# EAGLE board tinyduino-driver (EAGLE 6.4)
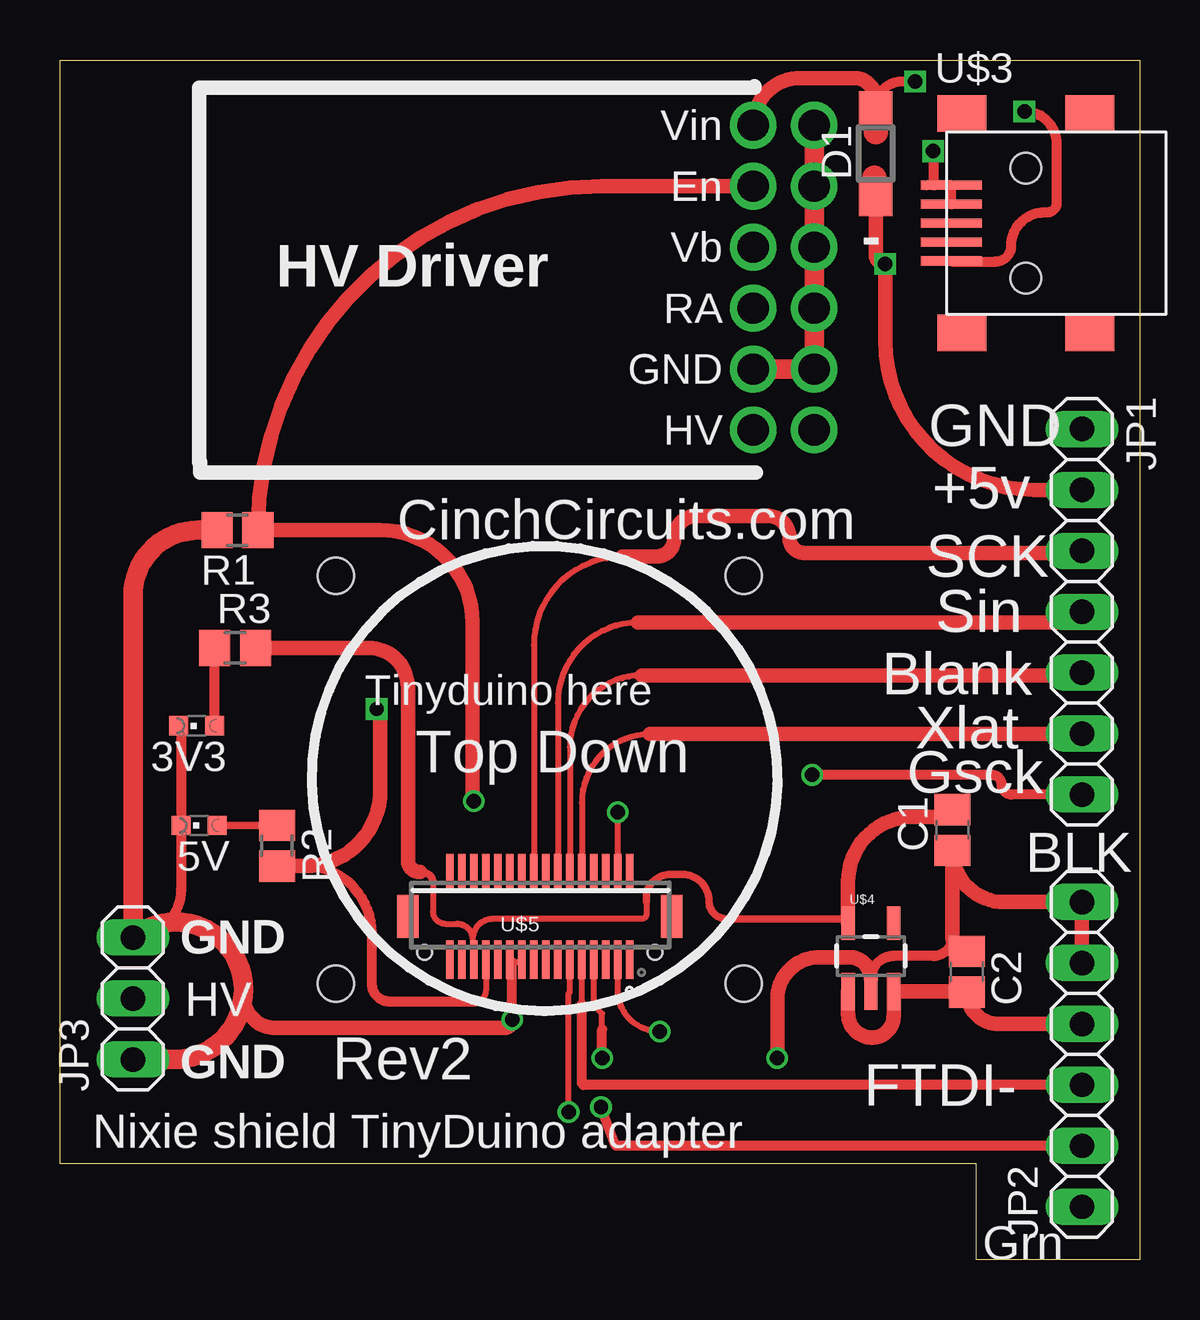
[diagram p0: board, top side]
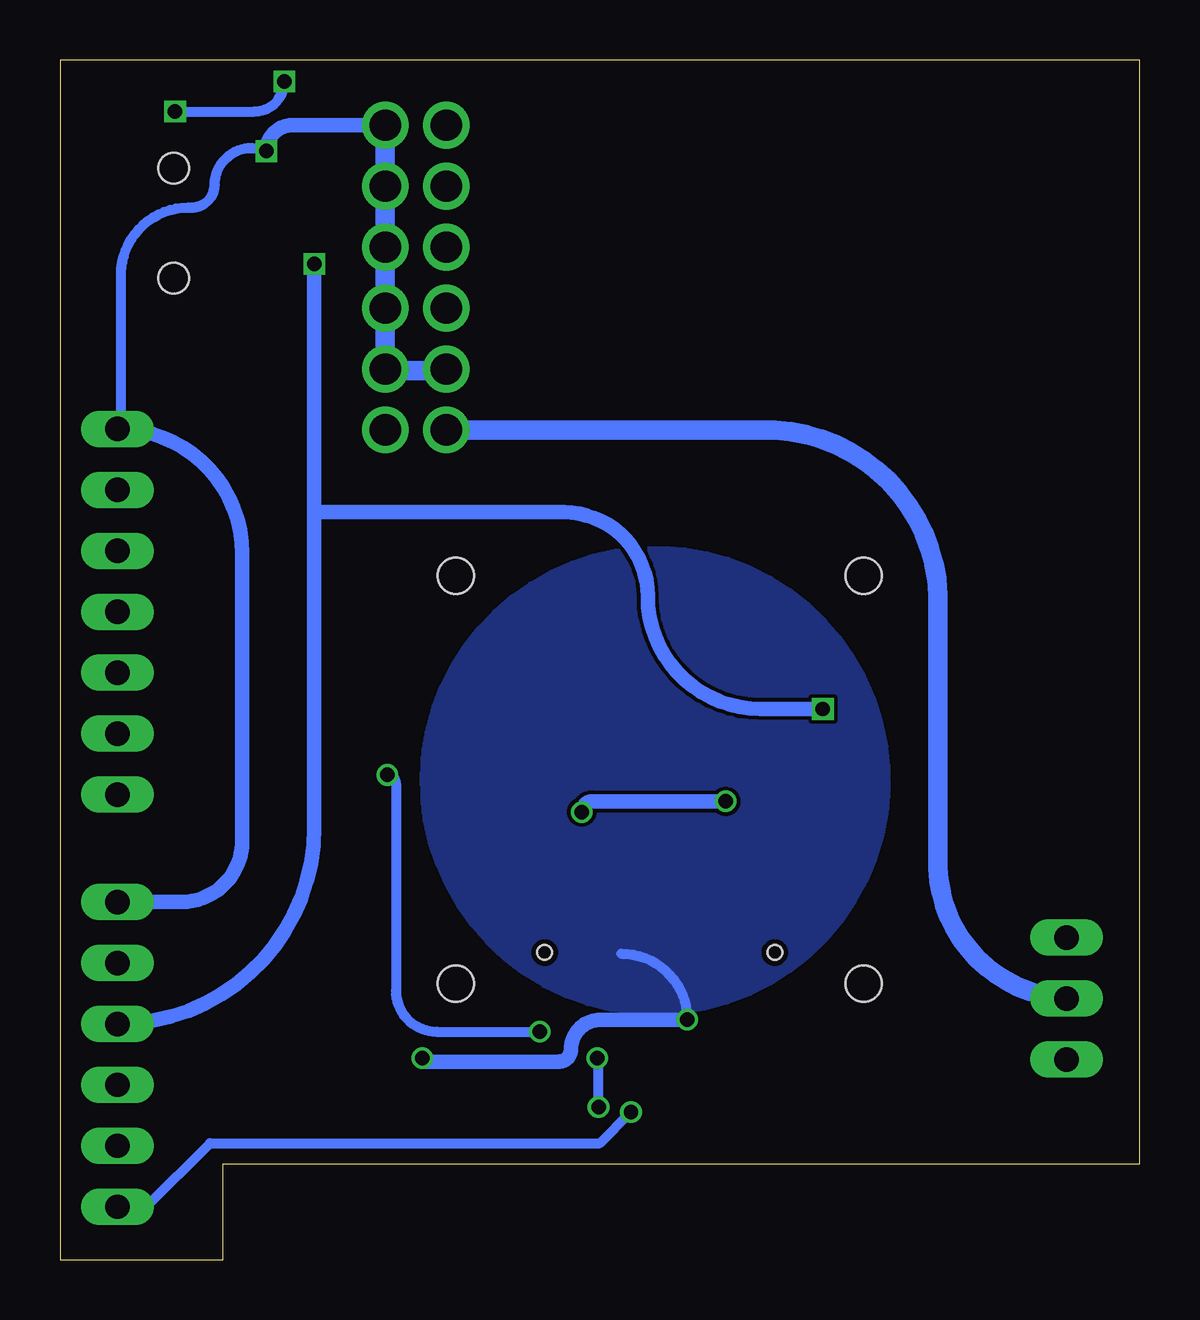
[diagram p1: board, bottom side, seen from below]

Size 45 x 50 mm. Coordinates in mm from the lower left corner, seen from the top.
Outline: 0,50 45,50 45,0 38.2,0 38.2,4 0,4 0,50
Copper layers (1*16): Top 0.035mm / dielectric 1.5mm / Bottom 0.035mm
Design rules "Fusion_eagle_rule_v1.1": minimum track width 6mil, minimum drill 12mil, track to track 6mil, track to pad 6mil, pad to pad 6mil, via to via 6mil, smd to smd 0mil, copper to edge 10mil, drill to drill 10mil, minimum pad ring 10mil, minimum via ring 6mil, stop-mask expansion 2mil, vias tented up to drill 100mil, thermal gap 10mil
Holes 1.5 mm at 11.5,28.5 28.5,28.5 28.5,11.5 11.5,11.5

## Footprints (pad centres in the part's own frame; a part is rotated, then mirrored left to right if it is on the bottom)
CHIPLED_0603 = smd 0.8 x 0.8: A 0,-0.75; C 0,0.75
C0805 = smd 1.3 x 1.5: 1 -0.85,0; 2 0.85,0
SOD123 = smd 1.4 x 1.4: A 1.9,0; C -1.9,0
1X07 = drill 1.016 long: 1 -7.62,0; 2 -5.08,0; 3 -2.54,0; 4 0,0; 5 2.54,0; 6 5.08,0; 7 7.62,0
1X06 = drill 1.016 long: 1 -6.35,0; 2 -3.81,0; 3 -1.27,0; 4 1.27,0; 5 3.81,0; 6 6.35,0
1X03 = drill 1.016 long: 1 -2.54,0; 2 0,0; 3 2.54,0
R0805 = smd 1.3 x 1.5: 1 -0.85,0; 2 0.85,0
NIIE-HV = drill 1.3: ENABLE 2.54,0; GND -5.08,0; GND1 -5.08,-2.54; GND2 -2.54,-2.54; GND4 0,-2.54; GND5 2.54,-2.54; GND6 5.08,-2.54; HV -7.62,0; N/C -7.62,-2.54; RADJUST -2.54,0; VBIAS 0,0; VIN 5.08,0
CONNECTER_MINI_USB2 = smd 2.54 x 0.381: + -2.337,0; - -2.337,-0.787; GND0 -2.337,1.575; GND1 -2.337,0.787; VDD -2.337,-1.575 | smd 2.032 x 1.524: P$6 -1.905,4.572; P$7 -1.905,-4.572; P$8 3.429,4.572; P$9 3.429,-4.572 | hole 1.27: 0.762,2.286; 0.762,-2.286
SOT23-5 = smd 0.55 x 1.524: 1 -0.95,-1.473; 2 0,-1.473; 3 0.95,-1.473 | smd 0.55 x 1.397: 4 0.95,1.372; 5 -0.95,1.372
TINYCIRCUITS_DF12-32-DS = smd 0.3 x 1.6: 1 -3.75,1.8; 2 -3.75,-1.8; 3 -3.25,1.8; 4 -3.25,-1.8; 5 -2.75,1.8; 6 -2.75,-1.8; 7 -2.25,1.8; 8 -2.25,-1.8; 9 -1.75,1.8; 10 -1.75,-1.8; 11 -1.25,1.8; 12 -1.25,-1.8; 13 -0.75,1.8; 14 -0.75,-1.8; 15 -0.25,1.8; 16 -0.25,-1.8; 17 0.25,1.8; 18 0.25,-1.8; 19 0.75,1.8; 20 0.75,-1.8; 21 1.25,1.8; 22 1.25,-1.8; 23 1.75,1.8; 24 1.75,-1.8; 25 2.25,1.8; 26 2.25,-1.8; 27 2.75,1.8; 28 2.75,-1.8; 29 3.25,1.8; 30 3.25,-1.8; 31 3.75,1.8; 32 3.75,-1.8 | smd 0.9 x 1.8: F1 -5.5,0; F2 5.5,0 | hole 0.6: -4.8,1.5; 4.8,1.5

## Placement (x,y rotation side)
3V3  [CHIPLED_0603]  5.7,22.25 90 top
5V  [CHIPLED_0603]  5.8,18.1 90 top
C1  [C0805]  37.2,17.9 90 top
C2  [C0805]  37.8,12 270 top
D1  MBR0520LT  [SOD123]  34,46.1 90 top
JP1  [1X07]  42.6,27 270 top
JP2  [1X06]  42.6,8.55 90 top
JP3  [1X03]  3.04,10.88 90 top
R1  10k  [R0805]  7.4,30.4 180 top
R2  [R0805]  9.05,17.25 270 top
R3  [R0805]  7.3,25.5 0 top
U$1  [DOCFIELD-TINYCIRCUITS-PCB]  82.76,6.25 0 top  (outside the outline)
U$2  HV-MODULE-EBAY  [NIIE-HV]  28.9,42.2 90 top
U$3  USB-MICRO-SMD  [CONNECTER_MINI_USB2]  39.5,43.2 0 top
U$4  3V3-LDO-TI  [SOT23-5]  33.8,12.65 0 top
U$5  TINYCIRCUITS-DF12-32-DS-BOTTOM  [TINYCIRCUITS_DF12-32-DS]  20,14.3 180 top

## Library data of the parts
3V3 5V = adafruit
C1 C2 R1-R3 = resistor
D1 = diode
JP1-JP3 = pinhead
U$1 = tinycircuits; NO_BOM: TRUE
U$2-U$5 = mgregg

## Nets
+3V3: C1.2 R3.2 U$4.5 U$5.27
+5V: C2.2 D1.C JP1.2 JP2.4 R2.2 U$4.1 U$4.3 U$5.25
AD0: U$5.22
AD1: U$5.24
AD2: U$5.26
AD3: U$5.28
AD4/SDA: U$5.30
AD5/SDL: U$5.32
AREF: U$5.20
GND: 3V3.C 5V.C C1.1 C2.1 JP1.1 JP2.5 JP2.6 JP3.1 JP3.3 R1.2 U$2.GND U$2.GND1 U$2.GND2 U$2.GND4 U$2.GND5 U$2.GND6 U$3.GND0 U$3.GND1 U$4.2 U$5.19 U$5.21
HVOUT: JP3.2 U$2.HV
IO0: JP2.3 U$5.9
IO1: JP2.2 U$5.7
IO2: U$5.5
IO3: JP1.7 U$5.3
IO4: U$5.1
IO5: U$5.2
IO6: R1.1 U$2.ENABLE U$5.4
IO7: U$5.6
IO8: U$5.8
IO9: JP1.6 U$5.10
IOREF: U$5.31
MISO: U$5.16
MOSI: JP1.4 U$5.14
N$1: 3V3.A R3.1
N$2: 5V.A R2.1
N$7: U$3.+
N$8: U$4.4
N$11: U$2.RADJUST
N$13: U$2.VBIAS
RESET: JP2.1 U$5.11
RSV0: U$5.13
RSV1: U$5.15
RSV2: U$5.17
SCK: JP1.3 U$5.18
SS: JP1.5 U$5.12
USB+5V: D1.A U$2.VIN U$3.VDD
VBATT: U$5.29
VIN: U$5.23

## Tracks (layer width: path | path; a pad name or v marks a point on that pad's centre or on a via)
+3V3
  Top 0.254: 15.55,15.7 15.55,14.5 arc90 16.05,14 16.55,14 arc-90 17.2,13.35 | 17.2,13.35 17.2,12.55 arc90 U$5.27 | 24.45,14.9 24.45,14.4 arc-90 24.25,14.2 18.05,14.2 arc90 17.2,13.35
  Top 0.305: U$4.5 arc90 32.67,14.2 27.8,14.2 arc-90 27.05,14.95 arc90 25.95,16.05 25.45,16.05 arc74 24.45,15.3 24.45,14.9 | 15,16.15 15.1,16.15 arc-90 15.55,15.7
  Top 0.61: C1.2 arc-90 36.9,18.45 35.55,18.45 arc90 32.85,15.75 U$4.5 | R3.2 12.85,25.5 arc-90 14.5,23.85 14.5,16.65 arc90 15,16.15
+5V  (via drill 0.6)
  Top 0.254: U$5.25 17.75,11.2 arc-90 17.3,10.75
  Top 0.406: 34.52,41.62 arc90 v34.4,41.5 arc90 34.35,41.45 | 17.3,10.75 13.75,10.75 arc-90 13,11.5 13,13.6 arc90 10.2,16.4
  Top 0.61: U$4.1 32.85,10.25 arc90 33.85,9.25 arc90 34.75,10.15 U$4.3 37.77,11.18 arc-90 C2.2 arc90 39.13,9.82 JP2.4 | JP1.2 40.62,32.08 arc-90 34.4,38.3 v34.4,41.5 arc-90 34,41.9 D1.C | R2.2 10.2,16.4 arc90 13.35,19.55 13.35,22.8 arc90 v13.2,22.95
  Bottom 0.61: JP2.4 arc-90 34.4,18.02 34.4,31.15 | 34.4,31.15 v34.4,41.5 | v13.2,22.95 15.8,22.95 arc90 20.5,27.65 arc-90 24,31.15 34.4,31.15
GND  (via drill 0.6)
  Top 0.254: U$5.21 arc-90 18.85,12.4 19.15,12.4 arc90 U$5.19
  Top 0.305: 4.95,18.2 arc90 5V.C
  Top 0.406: 36.45,44.77 U$3.GND0 U$3.GND1 | 36.45,44.77 36.12,44.77 | U$2.GND6 arc90 31.22,47.5 31.2,47.5 | v36.4,46.2 36.4,44.83 arc90 36.45,44.77 | 37.2,13.45 arc-90 36.4,12.65 34.75,12.65 arc90 33.8,11.7 U$4.2 | v18.85,10 18.85,12.4 | 3V3.C 5.05,22.25 5V.C 5.05,15.43 arc-90 JP3.3
  Top 0.61: C2.1 arc-90 37.2,13.45 C1.1 arc90 39.35,14.9 JP2.6 JP2.5 | 7.65,11.25 7.65,11 arc90 9,9.65 18.5,9.65 arc90 v18.85,10 | 33.8,11.7 arc90 32.9,12.6 31.65,12.6 arc90 29.9,10.85 v29.9,8.4
  Top 0.813: JP3.1 4.74,8.34 arc90 7.65,11.25 arc130 JP3.3 arc90 JP3.3 3.05,27.7 arc-90 5.75,30.4 R1.2 | U$2.GND U$2.GND1 U$2.GND2 U$2.GND4 U$2.GND5 31.44,44.51 arc90 31.45,44.5 U$2.GND6 arc90 U$2.GND6
  Bottom 0.406: JP1.1 arc-90 42.45,34.77 42.45,41.05 arc90 39.65,43.85 39.5,43.85 arc-90 38.55,44.8 arc114 v36.4,46.2 | 21.6,12.75 arc90 v18.85,10
  Bottom 0.61: JP1.1 arc90 37.4,29.42 37.4,17.45 arc90 39.95,14.9 JP2.6 | U$2.GND6 35.32,47.28 arc-90 v36.4,46.2 | v29.9,8.4 arc-90 29.75,8.25 24.2,8.25 arc-90 23.7,8.75 arc90 22.45,10 v18.85,10
  pour Bottom: 28.84,15.61 arc180 11.54,24.32 arc180
HVOUT
  Bottom 0.813: U$2.HV 15.88,34.58 arc90 8.4,27.7 8.4,16.84 arc-90 JP3.2
IO0
  Top 0.254: 21.75,10.65 U$5.9
  Top 0.406: JP2.3 21.82,7.28 21.75,7.35 21.75,10.65
IO1  (via drill 0.6)
  Top 0.254: 22.6,9.6 22.6,10.25 22.25,10.6 U$5.7
  Top 0.406: JP2.2 23.16,4.74 v22.55,6.35 | v22.6,8.4 22.6,9.6
  Bottom 0.406: v22.55,6.35 22.55,8.35 v22.6,8.4
IO3  (via drill 0.6)
  Top 0.254: v25,9.5 arc-90 23.25,11.25 U$5.3
  Top 0.406: JP1.7 39.67,19.38 arc-90 39.25,19.8 arc90 38.85,20.2 v31.35,20.2
  Bottom 0.406: v31.35,20.2 arc90 31,19.85 31,11.2 arc-90 29.3,9.5 v25,9.5
IO6  (via drill 0.6)
  Top 0.254: U$5.4 v23.25,18.65
  Top 0.61: U$2.ENABLE 22.59,44.74 arc90 R1.1 13.35,30.4 arc-90 17.2,26.55 17.2,19.15 arc90 v17.25,19.1
  Bottom 0.61: v23.25,18.65 arc90 22.8,19.1 v17.25,19.1
IO9
  Top 0.254: 24.6,21.9 arc90 21.75,19.05 U$5.10
  Top 0.61: JP1.6 arc-90 42.58,21.9 24.6,21.9
MOSI
  Top 0.254: 24.1,26.55 arc90 20.75,23.2 U$5.14
  Top 0.61: JP1.4 arc-90 42.15,26.55 24.1,26.55
N$1
  Top 0.406: 3V3.A R3.1
N$2
  Top 0.305: R2.1 5V.A
N$3
  Bottom 0.813: 28.9,37.05 31.5,37.05 31.5,37.1 31.45,37.1 31.45,47.3
N$4
  Top 1.016: 33.9,44.2 33.95,44.2 33.95,45.1
RESET  (via drill 0.6)
  Top 0.254: v21.2,6.15 21.2,11.1 21.25,11.15 U$5.11
  Bottom 0.406: JP2.1 41.4,2.2 38.75,4.85 22.5,4.85 v21.2,6.15
SCK
  Top 0.254: 23.45,29.3 arc90 19.75,25.6 U$5.18
  Top 0.61: JP1.3 arc-90 42.36,29.3 arc90 42.21,29.45 31.05,29.45 arc-90 30.4,30.1 arc93 29.45,31 26.55,31 arc90 25.6,30.05 arc-90 24.85,29.3 23.45,29.3
SS
  Top 0.254: 24.25,24.35 arc90 21.25,21.35 U$5.12
  Top 0.61: JP1.5 arc-90 42.49,24.35 24.25,24.35
USB+5V  (via drill 0.6)
  Top 0.406: U$3.VDD arc90 37.19,41.6 39,41.6 arc90 39.65,42.25 arc-90 41.05,43.65 41.15,43.65 arc90 41.55,44.05 41.55,46.5 arc90 v40.2,47.85 | v35.65,49.1 35.1,49.1 arc90 D1.A
  Top 0.61: 34,48.05 34,48.35 arc90 33.1,49.25 30.87,49.25 arc90 U$2.VIN
  Top 1.016: 34,48.05 D1.A 34,47
  Bottom 0.406: v40.2,47.85 36.9,47.85 arc-90 v35.65,49.1

## Text on the board
tPlace: - | HV Driver | GND | CinchCircuits.com | +5v | SCK | Sin | Blank | Tinyduino here | Xlat | Top Down | Gsck | BLK | GND | HV | GND | Rev2 | FTDI- | Nixie shield TinyDuino adapter | Grn
Document: NOTES: | 1. PRINTED CIRCUIT BOARD MADE FROM NEMA GRADE FR-4 EPOXY LAMINATE | WITH 1 OUNCE COPPER PLATING AND .024 THICKNESS. | 2. ALL DIMENSIONS ARE GIVEN IN INCHES. | 3. CIRCUIT PATHS ARE FOR REFERENCE ONLY. | 4. HOLE SIZES SHOWN ARE FINISHED DIAMETERS AFTER PLATING. | 5. BOARD PLATED USING REFLOW OR SIMILAR METHOD. | 6. BOARD TO HAVE BLUE SOLDER MASK ON PLATED SURFACES USING WET FILM | SR100 OR SR1010 EPOXY. EQUIVALENT WET OR DRY FILM MAY BE USED. | 7. SILKSCREEN BOARD USING WHITE INK. | 8. THE FOLLOWING INFORMATION APPLIES TO THIS BOARD: | * .024 BOARD THICKNESS | * 2 COPPER LAYERS | * REQUIRES TOP SIDE SILKSCREEN | Released under the Creative Commons Attribution Share-Alike 3.0 License | http://creativecommons.org/licenses/by-sa/3.0 | Original Arduino Uno Design by Team Arduino | TinyDuino, TinyLily and TinyShield Designs by TinyCircuits | TinyShield RTC Design by Michael Gregg. www.cinchcircuits.com | Tinyduino adapter for nixie-tube clocks | 1